# Altium PCB currgenTPA_l.PcbDoc
Units mm, origin at the board's own origin, x right, y up, seen from the top; angles counter-clockwise.
Board outline 100 x 75 mm, 2 copper layers (Top Layer, Bottom Layer); 64 components, 42 nets, 207 pads, 18 vias.
Unrouted connection lines stored in the file: 55.
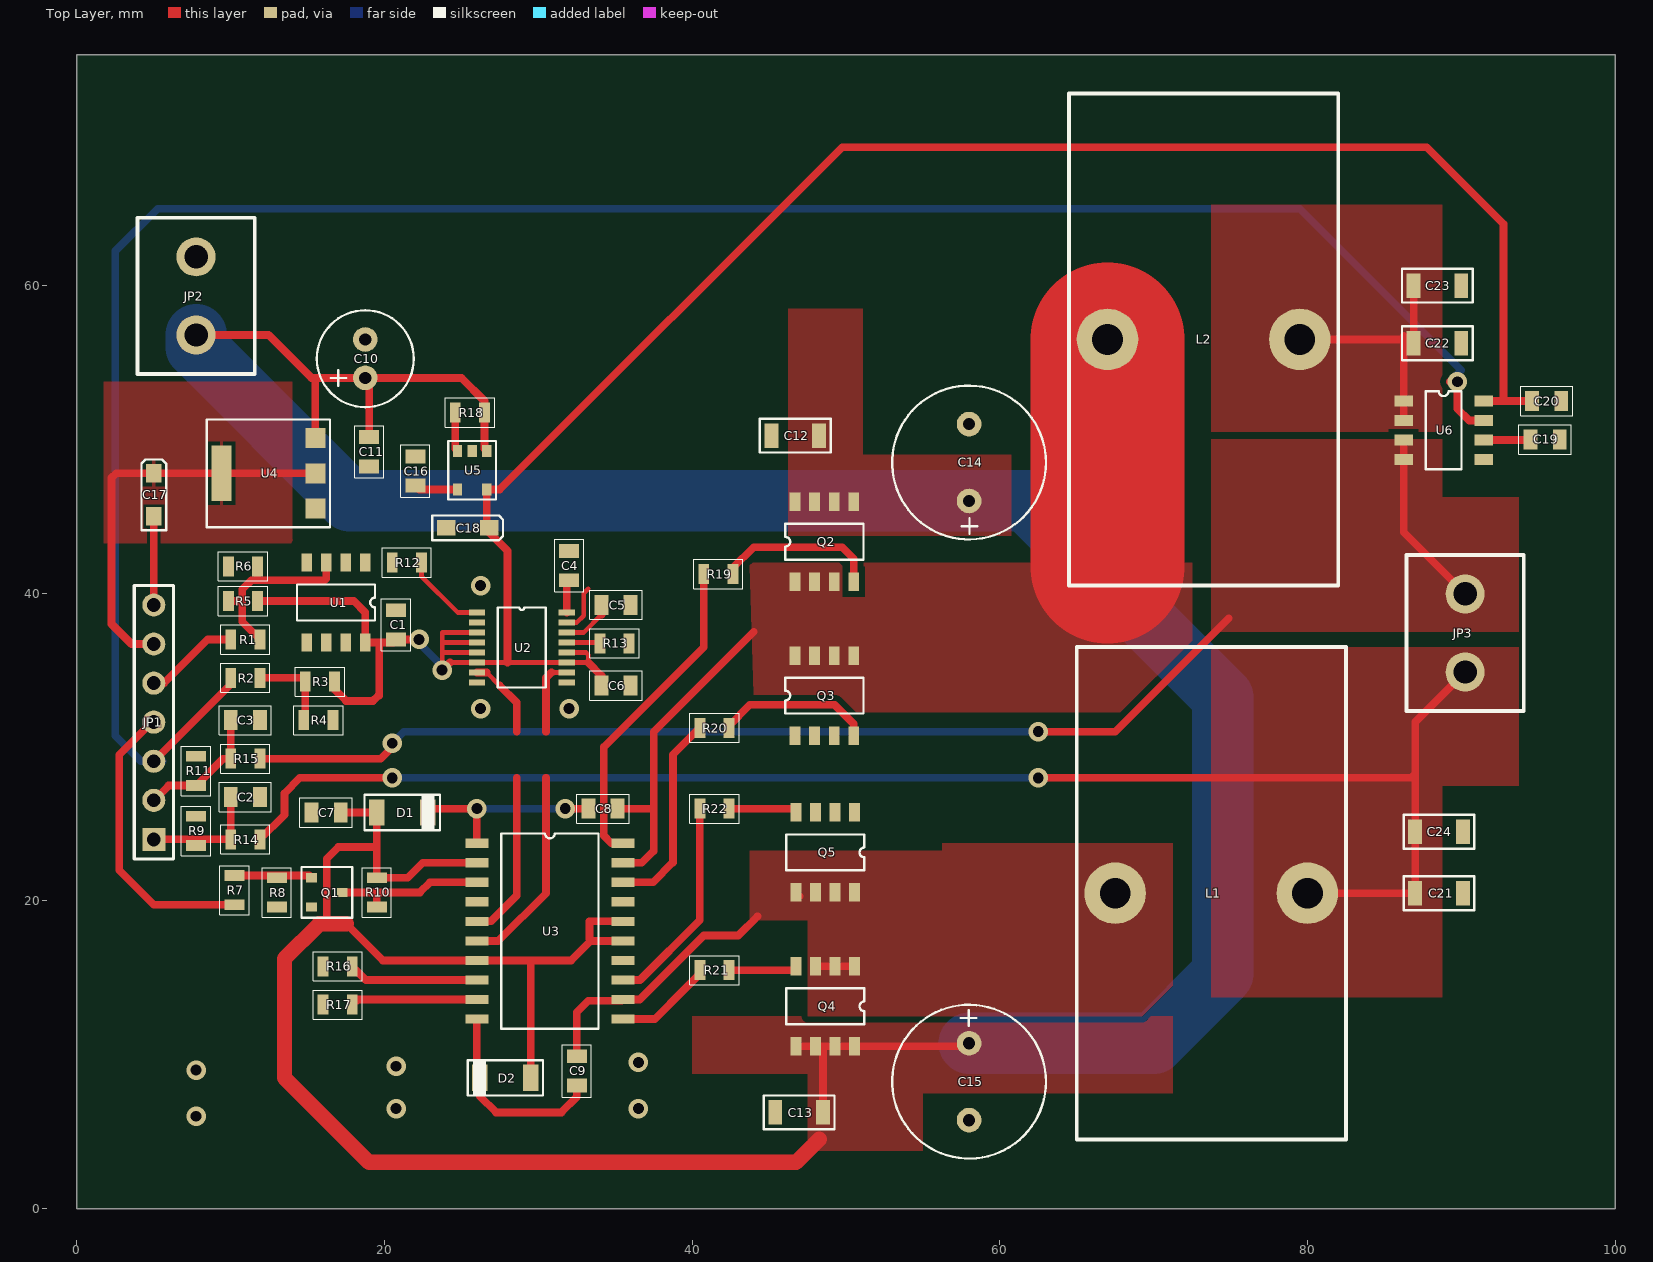
[diagram p0: Top Layer view]
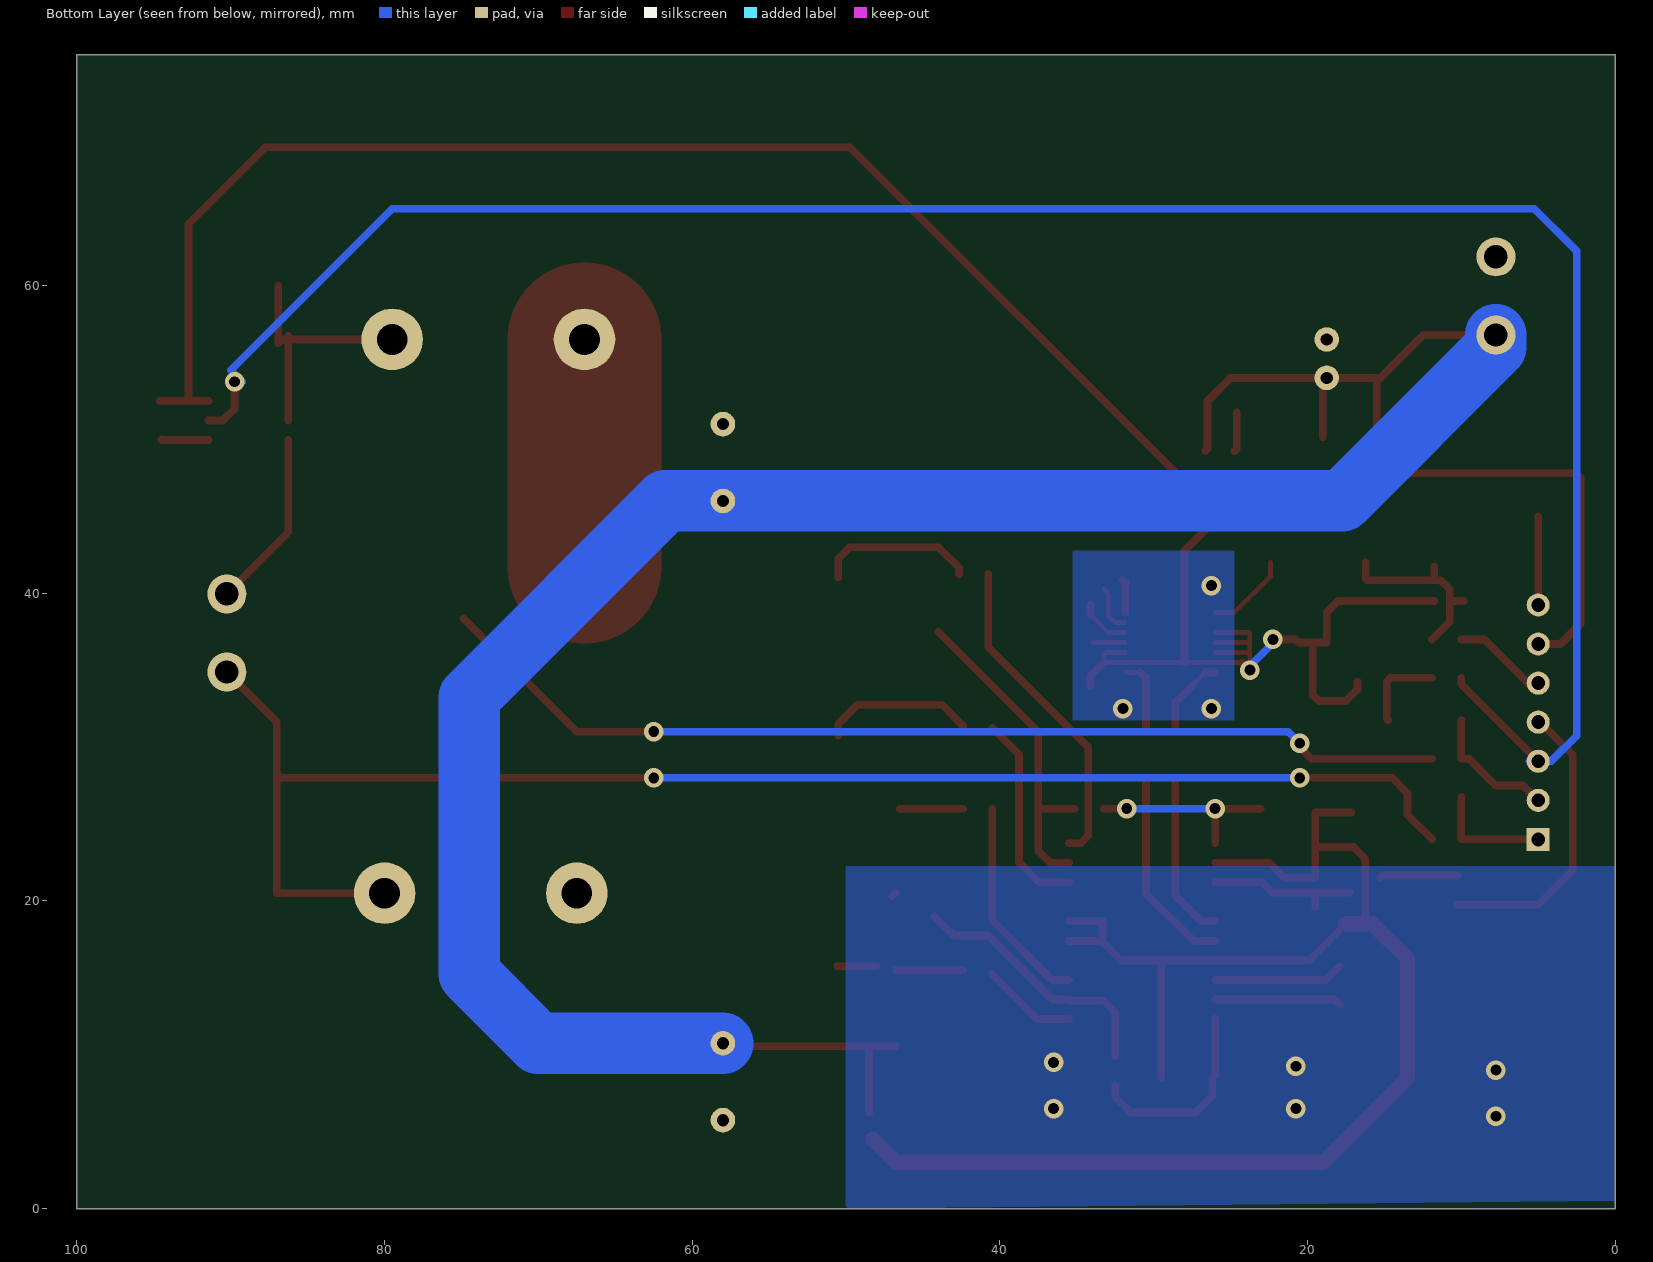
[diagram p1: Bottom Layer view, seen from below]

## Layer stack, top to bottom
Top Solder: solder mask 0.0102, Solder Resist, Dk 3.5
Top Layer: signal copper 0.0356
Dielectric1: dielectric 0.32, FR-4, Dk 4.8
Bottom Layer: signal copper 0.0356
Bottom Solder: solder mask 0.0102, Solder Resist, Dk 3.5

## Board outline
0,0 100,0 100,75 0,75

## Design rules (kind name [scope] priority, off if disabled: settings)
Clearance Clearance_8 [InNamedPolygon('Q2D')] p1: gap=0.4
Clearance Clearance_7 [InNamedPolygon('C92')] p2: gap=0.4
Clearance Clearance_6 [InNamedPolygon('Q5D')] p3: gap=0.4
Clearance Clearance_5 [InNamedPolygon('C102')] p4: gap=0.4
Clearance Clearance_4 [InNamedPolygon('VOUT-')] p5: gap=0.4
Clearance Clearance_3 [InNamedPolygon('VOUT+')] p6: gap=0.4
Clearance Clearance_2 [InNamedPolygon('C232')] p7: gap=0.4
Clearance Clearance_1 [InNamedPolygon('GND_T')] p8: gap=0.4
Clearance [All] p9: gap=0.2
MinimumSolderMaskSliver [All] p1: minsoldermaskwidth=0
PolygonConnect PolygonConnect_11 [All vs IsNamedPolygon('GND_B2')] p1: connectstyle=Direct reliefconductorwidth=0.254 reliefentries=4 polygonreliefangle="90 Angle" airgapwidth=0.254
PolygonConnect PolygonConnect_10 [All vs IsNamedPolygon('GND_B')] p2: connectstyle=Direct reliefconductorwidth=0.254 reliefentries=4 polygonreliefangle="90 Angle" airgapwidth=0.254
PolygonConnect PolygonConnect_9 [All vs IsNamedPolygon('GND_B')] p3: connectstyle=Direct reliefconductorwidth=0.254 reliefentries=4 polygonreliefangle="90 Angle" airgapwidth=0.254
PolygonConnect PolygonConnect_8 [All vs IsNamedPolygon('GND_T')] p4: connectstyle=Direct reliefconductorwidth=0.254 reliefentries=4 polygonreliefangle="90 Angle" airgapwidth=0.254
PolygonConnect PolygonConnect_7 [All vs IsNamedPolygon('Q2D')] p5: connectstyle=Direct reliefconductorwidth=0.254 reliefentries=4 polygonreliefangle="90 Angle" airgapwidth=0.254
PolygonConnect PolygonConnect_6 [All vs IsNamedPolygon('C92')] p6: connectstyle=Direct reliefconductorwidth=0.254 reliefentries=4 polygonreliefangle="90 Angle" airgapwidth=0.254
PolygonConnect PolygonConnect_5 [All vs IsNamedPolygon('Q5D')] p7: connectstyle=Direct reliefconductorwidth=0.254 reliefentries=4 polygonreliefangle="90 Angle" airgapwidth=0.254
PolygonConnect PolygonConnect_4 [All vs IsNamedPolygon('C102')] p8: connectstyle=Direct reliefconductorwidth=0.254 reliefentries=4 polygonreliefangle="90 Angle" airgapwidth=0.254
PolygonConnect PolygonConnect_3 [All vs IsNamedPolygon('VOUT-')] p9: connectstyle=Direct reliefconductorwidth=0.254 reliefentries=4 polygonreliefangle="90 Angle" airgapwidth=0.254
PolygonConnect PolygonConnect_2 [All vs IsNamedPolygon('VOUT+')] p10: connectstyle=Direct reliefconductorwidth=0.254 reliefentries=4 polygonreliefangle="90 Angle" airgapwidth=0.254
PolygonConnect PolygonConnect_1 [All vs IsNamedPolygon('C232')] p11: connectstyle=Direct reliefconductorwidth=0.254 reliefentries=4 polygonreliefangle="90 Angle" airgapwidth=0.254
PolygonConnect [All] p12: connectstyle=Relief reliefconductorwidth=0.254 reliefentries=4 polygonreliefangle="90 Angle" airgapwidth=0.254
RoutingVias [All] p1: holewidth=0.6 width=1 viastyle="Through Hole" minholewidth=0.711 minwidth=1.27 maxholewidth=0.711 maxwidth=1.27
SilkToSilkClearance [All] p1: silktosilkclearance=0
SilkToSolderMaskClearance SilkscreenOverComponentPads [IsPad] p1: minsilkscreentomaskgap=-2 clearancetoexposedcopper=TRUE
SolderMaskExpansion [All] p1: expansion=0.102
Width [All] p1: maxlimit=10 minlimit=0.2 preferedwidth=0.5
27 further rules are at their usual default settings.

## Components (designator, comment, footprint, x,y, rotation, side; value= is the part's Value field where it differs from the comment)
C1 "1u" C-0805 20.75,37 r90 top
C2 "100n" C-0805 10,26.75 r0 top
C3 "100n" C-0805 10,31.75 r0 top
C4 "1u" C-0805 32,42.75 r270 top
C5 "1n" C-0805 36,39.25 r180 top
C6 "10u" C-0805 36,34 r180 top
C7 "100n" C-0805 15.25,25.75 r0 top
C8 "330n" C-0805 33.25,26 r0 top
C9 "330n" C-0805 32.5,8 r90 top
C10 "100u*25V" EXR-6.3X11 18.75,56.5 r270 top
C11 "100n" C-0805 19,48.25 r90 top
C12 "3u3" C-1206 48.25,50.25 r180 top
C13 "3u3" C-1206 48.5,6.25 r180 top
C14 "4700u*25V" EXR-10X12.5 58,51 r270 top
C15 "4700u*25V" EXR-10X12.5 58,5.75 r90 top
C16 "100n" C-0805 22,47 r90 top
C17 "22u" TANTAL-A 5,45 r90 top
C18 "22u" TANTAL-A 24,44.25 r0 top
C19 "1n" C-0805 94.5,50 r0 top
C20 "100n" C-0805 96.5,52.5 r180 top
C21 "3u3" C-1206 87,20.5 r0 top
C22 "3u3" C-1206 90,56.25 r180 top
C23 "3u3" C-1206 90,60 r180 top
C24 "3u3" C-1206 87,24.5 r0 top
D1 "LL4148" SOD-80 19.5,25.75 r0 top
D2 "LL4148" SOD-80 29.5,8.5 r180 top
JP1 "Header 7" HDR1X7 5,24 r90 top
JP2 "Header 2" KLEMMA2 7.75,54.25 r90 top
JP3 "Header 2" KLEMMA2 90.25,42.5 r270 top
L1 "22uH 15A" L_TOR 67.5,20.5 r0 top
L2 "22uH 15A" L_TOR 67,56.5 r0 top
Q1 "BC847C" SOT-23 15.25,21.5 r270 top
Q2 "IRF7842" SO8_MOSFET 50.5,40.75 r90 top
Q3 "IRF7842" SO8_MOSFET 50.5,30.75 r90 top
Q4 "IRF7842" SO8_MOSFET 46.75,15.75 r270 top
Q5 "IRF7842" SO8_MOSFET 46.75,25.75 r270 top
R1 "100k" R-0805 10,37 r0 top
R2 "200k" R-0805 10,34.5 r0 top
R3 "100k" R-0805 16.75,34.25 r180 top
R4 "100k" R-0805 14.75,31.75 r0 top
R5 "100k" R-0805 11.75,39.5 r180 top
R6 "100k" R-0805 11.75,41.75 r180 top
R7 "10k" R-0805 10.25,19.75 r90 top
R8 "47k" R-0805 13,21.5 r270 top
R9 "2k4" R-0805 7.75,25.5 r270 top
R10 "15k" R-0805 19.5,21.5 r270 top
R11 "2k4" R-0805 7.75,27.5 r90 top
R12 "1k" R-0805 20.5,42 r0 top
R13 "100k" R-0805 34,36.75 r0 top
R14 "10k" R-0805 10,24 r0 top
R15 "10k" R-0805 10,29.25 r0 top
R16 "100k" R-0805 16,15.75 r0 top
R17 "100k" R-0805 16,13.25 r0 top
R18 "1k" R-0805 26.5,51.75 r180 top
R19 "0" R-0805 40.75,41.25 r0 top
R20 "0" R-0805 40.5,31.25 r0 top
R21 "0" R-0805 40.5,15.5 r0 top
R22 "0" R-0805 40.5,26 r0 top
U1 "LM2904" SO8-(SOT-96-1) 18.75,42 r270 top
U2 "TPA2001D1" TSSOP16-(SOT-403-1) 26,38.75 r0 top
U3 "HIP4081AIB" SO20-(SOT-163-1) 26,23.75 r0 top
U4 "LD1117-33" SOT-223-(SC-73) 15.5,45.5 r90 top
U5 "LP2982-5.0" SOT-23-5 24.75,47.25 r0 top
U6 "ACS712" SO8-(SOT-96-1) 86.25,52.5 r0 top

## Footprints (in the part's own frame and the unit in brackets; to place one, negate y for a bottom-side part, rotate by r counter-clockwise, add the part's x,y. Pads: shape width x height; smd on the part's side, far side on the other; paste and mask are expansions set on the pad)
C-0805 [mm]
  rect 0.9x1.3 smd: 1(0,0) 2(1.9,0)
  silkscreen extent -0.75,-0.95 2.65,0.95
C-1206 [mm]
  rect 0.9x1.6 smd: 1(0,0) 2(3.1,0)
  silkscreen extent -0.75,-1.1 3.85,1.1
EXR-6.3X11 [mm]
  round 1.6 hole 0.8: 1(0,0) 2(2.5,0)
  silkscreen extent -1.9,-3.15 4.4,3.15
EXR-10X12.5 [mm]
  round 1.6 hole 0.8: 1(0,0) 2(5,0)
  silkscreen extent -2.5,-5 7.5,5
HDR1X7 [mm] "Connector; Header; 7 Position"
  rect 1.5x1.5 hole 0.9: 1(0,0)
  round 1.5 hole 0.9: 2(2.54,0) 3(5.08,0) 4(7.62,0) 5(10.16,0) 6(12.7,0) 7(15.24,0)
  silkscreen extent -1.27,-1.27 16.51,1.27
KLEMMA2 [mil]
  round 100 hole 60: 1(100,0) 2(300,0)
  silkscreen extent 0,-150 400,150
L_TOR [mm]
  round 4 hole 2: 1(0,0) 2(12.5,0)
  silkscreen extent -2.5,-16 15,16
R-0805 [mm]
  rect 0.7x1.3 smd: 1(0,0) 2(1.9,0)
  silkscreen extent -0.65,-0.95 2.55,0.95
SO8-(SOT-96-1) [mm]
  rect 1.2x0.7 smd: 1(0,0) 2(0,-1.27) 3(0,-2.54) 4(0,-3.81) 5(5.2,-3.81) 6(5.2,-2.54) 7(5.2,-1.27) 8(5.2,0)
  silkscreen extent 1.43,-4.44 3.77,0.64
SO8_MOSFET [mm]
  rect 1.2x0.7 smd: 1(0,3.81) 1(0,2.54) 1(0,1.27) 4(0,0) 5(5.2,0) 5(5.2,1.27) 5(5.2,2.54) 5(5.2,3.81)
  silkscreen extent 1.43,-0.63 3.77,4.44
SO20-(SOT-163-1) [mm]
  rect 1.5x0.6 smd: 1(0,0) 2(0,-1.27) 3(0,-2.54) 4(0,-3.81) 5(0,-5.08) 6(0,-6.35) 7(0,-7.62) 8(0,-8.89) 9(0,-10.16) 10(0,-11.43) 11(9.5,-11.43) 12(9.5,-10.16) 13(9.5,-8.89) 14(9.5,-7.62) 15(9.5,-6.35) 16(9.5,-5.08) 17(9.5,-3.81) 18(9.5,-2.54) 19(9.5,-1.27) 20(9.5,0)
  silkscreen extent 1.58,-12.06 7.92,0.64
SOD-80 [mm]
  rect 1x1.7 smd: A(0,0) K(3.3,0)
  silkscreen extent -0.8,-1.15 4.1,1.15
SOT-23 [mm]
  rect 0.6x0.7 smd: 1(1.9,0) 2(0,0) 3(0.95,2)
  silkscreen extent -0.7,-0.65 2.6,2.65
SOT-23-5 [mm]
  rect 0.6x0.8 smd: 1(1.9,2) 2(0.95,2) 3(0,2) 4(0,-0.5) 5(1.9,-0.5)
  silkscreen extent -0.6,-1.15 2.5,2.65
SOT-223-(SC-73) [mm]
  rect 1.3x1.3 smd: 1(0,0) 2(2.3,0) 3(4.6,0)
  rect 3.6x1.3 smd: 4(2.3,6.1)
  silkscreen extent -1.2,-0.95 5.8,7.05
TANTAL-A [mm]
  rect 1.2x1 smd: 1(0,0) 2(2.8,0)
  silkscreen extent -0.9,-0.8 3.7,0.8
TSSOP16-(SOT-403-1) [mm]
  rect 1.05x0.4 smd: 1(0,0) 2(0,-0.65) 3(0,-1.3) 4(0,-1.95) 5(0,-2.6) 6(0,-3.25) 7(0,-3.9) 8(0,-4.55) 9(5.85,-4.55) 10(5.85,-3.9) 11(5.85,-3.25) 12(5.85,-2.6) 13(5.85,-1.95) 14(5.85,-1.3) 15(5.85,-0.65) 16(5.85,0)
  silkscreen extent 1.36,-4.88 4.49,0.33

## Part data
C1 C2 C3 C4 C5 C6 C7 C8 C9 C11 C12 C13 C16 C19 C20 C21 C22 C23 C24: library part C
C10 C14 C15: library part C-EL-DIP
C17 C18: library part C-EL-TAN
D1 D2: library part DIODE
JP1: "Header, 7-Pin"
JP2 JP3: "Header, 2-Pin"
L1 L2: library part L*
Q1: library part NPN
R1 R2 R3 R4 R5 R6 R7 R8 R9 R10 R11 R12 R13 R14 R15 R16 R17 R18 R19 R20 R21 R22: library part R
U1: "2 Operation amplifier"
U2: "1-W FILTERLESS MONO AUDIO POWER AMPLIFIER"
U4: library part LD1117
U5: library part LP2982, "50mA Ultra Low-Dropout Regulator"

## Via types
v1: diameter 1.27, hole 0.711, Top Layer to Bottom Layer, 18 vias

## Nets (pads, with @x,y where several pads share a name; then routed paths per layer and width w, separated by ;. In a path a pad name is that pad's centre, name@x,y a point inside that pad or via, vN(x,y) a via of type N, cw(c..) or ccw(c..) an arc to the next point about the centre after c; other vN are vias at no path point)
2: 
+12V: C7.2 C10.2 C11.2 C12.1 C13.1 C14.2 C15.2 D1.A D2.A JP2.1 Q2.5 Q4.5 R10.1 R18.1 U3.2 U3.7 U3.15 U3.16 U4.3 U5.1 | length 264.2
  Top Layer w0.5: JP2.1 12.46,56.79 15.25,54 15.5,54 ; U4.3 15.5,54 ; 16.25,18.51 16.25,22.75 17,23.5 19.5,23.5 ; C7.2 D1.A R10.1 21.5,21.5 22.48,22.48 U3.2 ; 17.5,18.51 19.88,16.13 U3.7 29.5,16.13 ; C11.2 19,53.75 C10.2 ; U5.1 26.5,49.4 R18.1 26.5,52.5 25,54 C10.2 ; D2.A 29.5,16.13 ; U3.15 33.4,17.4 ; U3.16 33.33,18.67 33.33,17.54 33.4,17.47 33.4,17.4 ; Q2.5@46.69,45.95 Q2.5@46.74,46 ; Q4.5@46.75,10.55 48.02,10.55 48.55,10.55 ; C13.1 48.5,10.5 48.55,10.55 ; C15.2@58,10.55 50.56,10.55 49.29,10.55 48.55,10.55 ; 15.5,54 C10.2 ; 29.5,16.13 32.13,16.13 33.4,17.4
  Top Layer w1: 17.5,18.51 15.76,18.51 13.5,16.25 13.5,8.5 19,3 46.75,3 48.25,4.5
  Bottom Layer w0.5: JP2.1 9.04,56.79
  Bottom Layer w4: JP2.1 7.75,56 17.75,46 C14.2 61.75,46 74.5,33.25 74.5,15.25 70,10.75 C15.2
DIS: Q1.3 R10.2 U3.3 | length 10
  Top Layer w0.5: Q1.3 19.5,20.55 ; R10.2 19.5,20.55 ; U3.3 22.96,21.21 22.3,20.55 19.5,20.55
EN: JP1.4 R7.1 | length 19.1
  Top Layer w0.5: JP1.4 4.87,31.62 2.75,29.5 2.75,22 5,19.75 R7.1
GND: C1.2 C2.2 C3.2 C4.1 C5.1 C6.1 C7.1 C10.1 C11.1 C12.2 C13.2 C14.1 C15.1 C16.2 C17.1 C18.1 C19.2 C20.1 C21.2 C22.1 C23.1 C24.2 JP1.7 JP2.2 Q1.1 Q3.1 Q5.1 R4.2 R6.2 R8.2 R9.1 R11.2 R13.2 R16.1 R17.1 U1.4 U2.8 U2.9 U2.15 U3.4 U3.14 U3.17 U4.1 U5.2 U6.5 | length 8.9
  Top Layer w0.3: U2.15 32.5,38.1 32.95,38.55 32.95,40 33.25,40.3
  Top Layer w0.5: JP1.7 C17.1
  other v1: 7.75,6 20.75,6.5 36.5,6.5 7.75,9 20.75,9.25 36.5,9.5 26.25,32.5 32,32.5 26.25,40.5
NetC2_1: C2.1 JP1.1 R9.2 R14.1 | length 7.7
  Top Layer w0.5: JP1.1 R14.1 C2.1
NetC3_1: C3.1 JP1.2 R11.1 R15.1 | length 8.6
  Top Layer w0.5: JP1.2 5.96,27.5 R11.1 9.5,29.25 R15.1 C3.1
NetC4_2: C4.2 U2.16 | length 2.2
  Top Layer w0.5: U2.16 31.85,40.7 C4.2
NetC5_2: C5.2 U2.14 | length 3.4
  Top Layer w0.3: U2.14 32.95,37.45 34.1,38.6
  Top Layer w0.5: 34.1,38.6 C5.2
NetC8_1: C8.1 D1.K U3.1 | length 12.5
  Top Layer w0.5: D1.K@23.05,26 v1(26,26) U3.1 ; v1(31.75,26) C8.1
  Bottom Layer w0.5: v1(26,26) v1(31.75,26)
NetC8_2: C8.2 L2.1 Q2.1 Q3.5 U3.19 | length 36.7
  Top Layer w0.2: 67,41.75 67.25,41.5
  Top Layer w0.5: C8.2 37.5,26 ; U3.19 36.73,22.48 37.5,23.25 37.5,26 ; 44,37.5 37.5,31 37.5,26
  Top Layer w10: 67,41.75 L2.1
NetC9_1: C9.1 D2.K U3.10 | length 13
  Top Layer w0.5: U3.10 26,8.7 D2.K 26.2,7.3 27.25,6.25 31.5,6.25 32.5,7.25 C9.1
NetC9_2: C9.2 L1.1 Q4.1 Q5.5 U3.12 | length 20.2
  Top Layer w0.5: C9.2 32.5,12.75 33.25,13.5 35.41,13.5 U3.12 36.59,13.59 40.75,17.75 43,17.75 44.25,19 ; Q5.5@46.75,20.55 Q5.5@47,20.3 ; Q4.1@48.02,15.75 49.29,15.75 Q4.1@50.56,15.75 ; L1.1@67.45,20.55 L1.1
NetC16_1: C16.1 U5.4 | length 2.9
  Top Layer w0.5: C16.1 22.25,46.75 U5.4
NetC19_1: C19.1 U6.6 | length 3.1
  Top Layer w0.5: U6.6 94.46,49.96 C19.1
NetC22_2: C22.2 C23.2 L2.2 U6.1 U6.2 | length 16.8
  Top Layer w0.5: L2.2 86.25,56.5 ; U6.2 U6.1 86.25,56.5 ; 86.25,56.75 86.25,56.5 ; C23.2 C22.2 86.65,56.5 86.25,56.5
NetQ1_2: Q1.2 R7.2 R8.1 | length 5.1
  Top Layer w0.5: R7.2 15.1,21.65 Q1.2
NetQ2_4: Q2.4 R19.2 | length 10.4
  Top Layer w0.5: R19.2 42.65,41.65 44,43 49.75,43 50.5,42.25 Q2.4@50.5,41
NetQ3_4: Q3.4 R20.2 | length 10.1
  Top Layer w0.5: R20.2 42.4,31.4 43.75,32.75 49.25,32.75 50.5,31.5 Q3.4
NetQ4_4: Q4.4 R21.2 | length 4.3
  Top Layer w0.5: R21.2 Q4.4@46.75,15.5
NetQ5_4: Q5.4 R22.2 | length 4.1
  Top Layer w0.5: R22.2 Q5.4@46.5,26
NetR1_2: R1.2 R5.2 R6.1 U1.3 | length 12.3
  Top Layer w0.5: R5.2 10.75,39.5 ; R6.1 11.75,40.85 ; R1.2 10.75,38.15 10.75,39.5 ; U1.3 16.21,40.96 16.1,40.85 11.75,40.85 ; 10.75,39.5 10.75,40.25 11.35,40.85 11.75,40.85
NetR2_2: R2.2 R3.2 R4.1 U1.2 | length 5.6
  Top Layer w0.5: R2.2 14.6,34.5 R3.2 14.85,31.85 R4.1
NetR12_1: R12.1 U1.6 U1.7
NetR12_2: R12.2 U2.1 | length 5.5
  Top Layer w0.3: R12.2 22.4,41.1 24.75,38.75 U2.1
NetR13_1: R13.1 U2.13 | length 2.1
  Top Layer w0.3: U2.13 R13.1@33.95,36.8
NetR16_2: R16.2 U3.8 | length 8.5
  Top Layer w0.5: R16.2 18.79,14.86 U3.8
NetR17_2: R17.2 U3.9 | length 8.2
  Top Layer w0.5: R17.2 18.24,13.59 U3.9
NetR18_2: R18.2 U5.3 | length 2.6
  Top Layer w0.5: R18.2 24.6,49.4 U5.3
NetR19_1: R19.1 U3.20 | length 21.1
  Top Layer w0.5: U3.20 34.75,23.75 34.25,24.25 34.25,30 40.75,36.5 R19.1
NetR20_1: R20.1 U3.18 | length 13.3
  Top Layer w0.5: U3.18 37.46,21.21 38.75,22.5 38.75,29.5 R20.1
NetR21_1: R21.1 U3.11 | length 6.2
  Top Layer w0.5: U3.11 37.57,12.32 39.5,14.25 R21.1@40.5,15.25
NetR22_1: R22.1 U3.13 | length 13.9
  Top Layer w0.5: U3.13 36.61,14.86 40.5,18.75 R22.1
NetU1_1: U1.1 U1.5
PWM+: U2.7 U3.6 | length 18.6
  Top Layer w0.3: 26.65,34.85 27.5,34
  Top Layer w0.5: U3.6 27.4,17.4 30.5,20.5 30.5,28 ; U2.7 26.65,34.85 ; 27.5,34 28.6,32.9 28.6,31
PWM-: U2.10 U3.5 | length 15.9
  Top Layer w0.3: 30.85,34.85 U2.10
  Top Layer w0.5: U3.5 26.92,18.67 28.6,20.35 28.6,28 ; 30.5,31 30.5,34.5 30.85,34.85
SENSE: JP1.3 R2.1 U6.7 | length 141.6
  Top Layer w0.5: JP1.3 10,34.08 R2.1 ; v1@89.25,53.75 v1(89.75,53.75) 89.75,52 90.52,51.23 U6.7
  Bottom Layer w0.5: JP1.3@5.58,29.08 JP1.3 4.17,29.08 2.5,30.75 2.5,62.25 5.25,65 79.5,65 90,54.5 89.25,53.75 v1(89.75,53.75)
V_CONT: JP1.5 R1.1 | length 6.2
  Top Layer w0.5: JP1.5 5.66,34.16 8.5,37 R1.1
V_CPU: C17.2 JP1.6 U4.2 U4.4 | length 26.2
  Top Layer w0.5: JP1.6 3.55,36.7 2.25,38 2.25,47.5 2.55,47.8 C17.2 U4.4 U4.2
VCC: C1.1 C6.2 C18.2 C20.2 R3.1 R5.1 U1.8 U2.3 U2.4 U2.5 U2.6 U2.11 U2.12 U5.5 U6.8 | length 149.7
  Top Layer w0.3: v1(23.75,35) 23.75,37.45 U2.3 ; 23.8,36.8 U2.4 ; 23.825,36.15 U2.5 ; 24.25,35.5 U2.6 28,35.5 U2.11 33.25,35.5 33.25,36 33.1,36.15 U2.12
  Top Layer w0.5: R5.1 18,39.5 18.75,38.75 U1.8 19.65,36.8 ; R3.1 16.75,33.75 17.5,33 19.25,33 19.6,33.35 19.65,33.35 19.65,36.8 ; v1(22.25,37) C1.1 20.55,36.8 19.65,36.8 ; v1(23.75,35) 24.25,35.5 ; 28,35.5 28,42.75 26.5,44.25 C18.2 26.65,44.4 U5.5 27.5,46.75 49.75,69 87.75,69 92.75,64 92.75,52.5 ; 33.25,35.5 34.1,34.65 C6.2 ; U6.8 92.75,52.5 ; C20.2 92.75,52.5
  Bottom Layer w0.5: v1(22.25,37) 22.25,36.75 v1@24,35
VOUT+: JP3.1 R15.2 U6.3 U6.4 | length 78.7
  Top Layer w0.5: R15.2 19.75,29.25 v1@20.75,30.25 ; v1(62.5,31) 67.5,31 74.875,38.375 ; U6.3 U6.4 86.25,43.96 JP3.1
  Bottom Layer w0.5: v1(20.5,30.25) 21.25,31 v1(62.5,31)
VOUT-: C21.1 C24.1 JP3.2 L1.2 R14.2 | length 101
  Top Layer w0.5: R14.2 13.5,25.6 13.5,27 14.5,28 v1(20.5,28) ; v1(62.5,28) 86.75,28 87,28.25 ; L1.2 C21.1 C24.1 87,28.25 ; JP3.2 87,31.63 87,28.25
  Bottom Layer w0.5: v1(20.5,28) v1(62.5,28) ; JP3.2@90.25,34.25 JP3.2
pads on no net: U2.2

## Polygon pours and split planes (outlines as drawn)
+12V on Top Layer "Q2D" (solid, remove dead copper, pour order 31): 46.94,43.75 60.75,43.75 60.75,49.018 51.083,49.018 51.083,58.5 46.25,58.5 46.25,43.75
NetC8_2 on Top Layer "C92" (solid, remove dead copper, pour order 30): 43.75,42 72.5,42 72.5,33.875 70.684,32.25 43.75,32.25 44.053,32.25
+12V on Top Layer "Q5D" (solid, remove dead copper, pour order 29): 40,12.5 71.25,12.5 71.25,7.5 55,7.5 55,3.75 47.5,3.75 47.5,8.75 40,8.75
NetC9_2 on Top Layer "C102" (solid, remove dead copper, pour order 27): 43.75,23.25 53.75,23.25 56.25,23.25 56.25,23.75 71.25,23.75 71.25,14.5 69.25,12.5 47.5,12.5 47.5,18.75 43.75,18.75
VOUT- on Top Layer "VOUT-" (solid, remove dead copper, pour order 26): 73.75,36.5 93.75,36.5 93.75,27.5 88.75,27.5 88.75,13.75 73.75,13.75
VOUT+ on Top Layer "VOUT+" (solid, remove dead copper, pour order 25): 73.75,50 88.75,50 88.75,46.25 93.75,46.25 93.75,37.5 73.75,37.5
NetC22_2 on Top Layer "C232" (solid, remove dead copper, pour order 24): 73.75,50.5 88.75,50.5 88.75,65.25 73.75,65.25
V_CPU on Top Layer "VCPU_T" (solid, remove dead copper, pour order 28): 1.75,53.75 14.014,53.75 14.014,43.513 14.25,43.25 1.75,43.25
GND on Bottom Layer "GND_B2" (solid, remove dead copper, pour order 33): 0,0.5 0,22.25 50,22.25 50,0
GND on Bottom Layer "GND_B" (solid, pour order 32): 24.75,42.75 24.75,31.75 35.25,31.75 35.25,42.75

## Silkscreen, mask and mechanical layers (free items; w line width, h text height)
Mechanical 1:
  lines w0.254: -2,-2 -2,77 102,77 102,-2 -2,-2
  lines w0.3: 0,0 0,75 100,75 100,0 0,0